# Altium PCB PCB5_V2.PcbDoc
Units mm, origin at the board's own origin, x right, y up, seen from the top; angles counter-clockwise.
Board outline 166 x 110 mm, 2 copper layers (Top Layer, Bottom Layer); 143 components, 60 nets, 336 pads, 115 vias.
Unrouted connection lines stored in the file: 1.
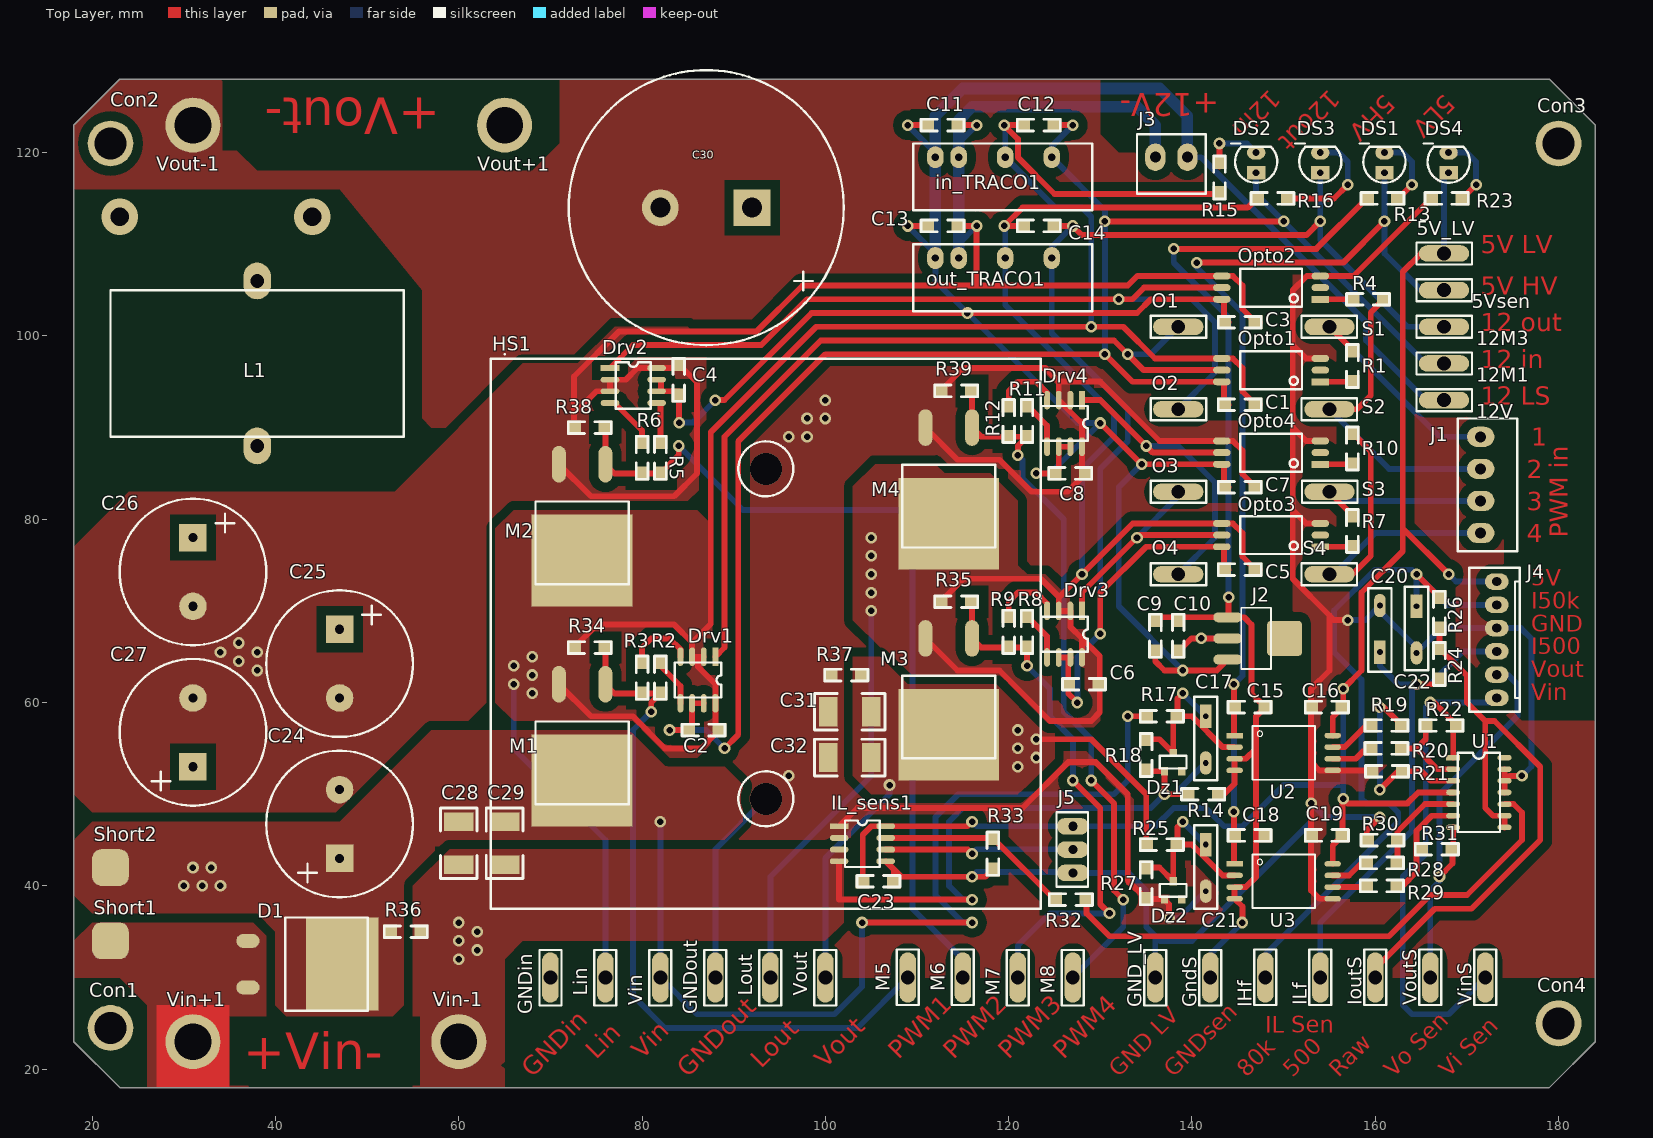
[diagram p0: Top Layer view]
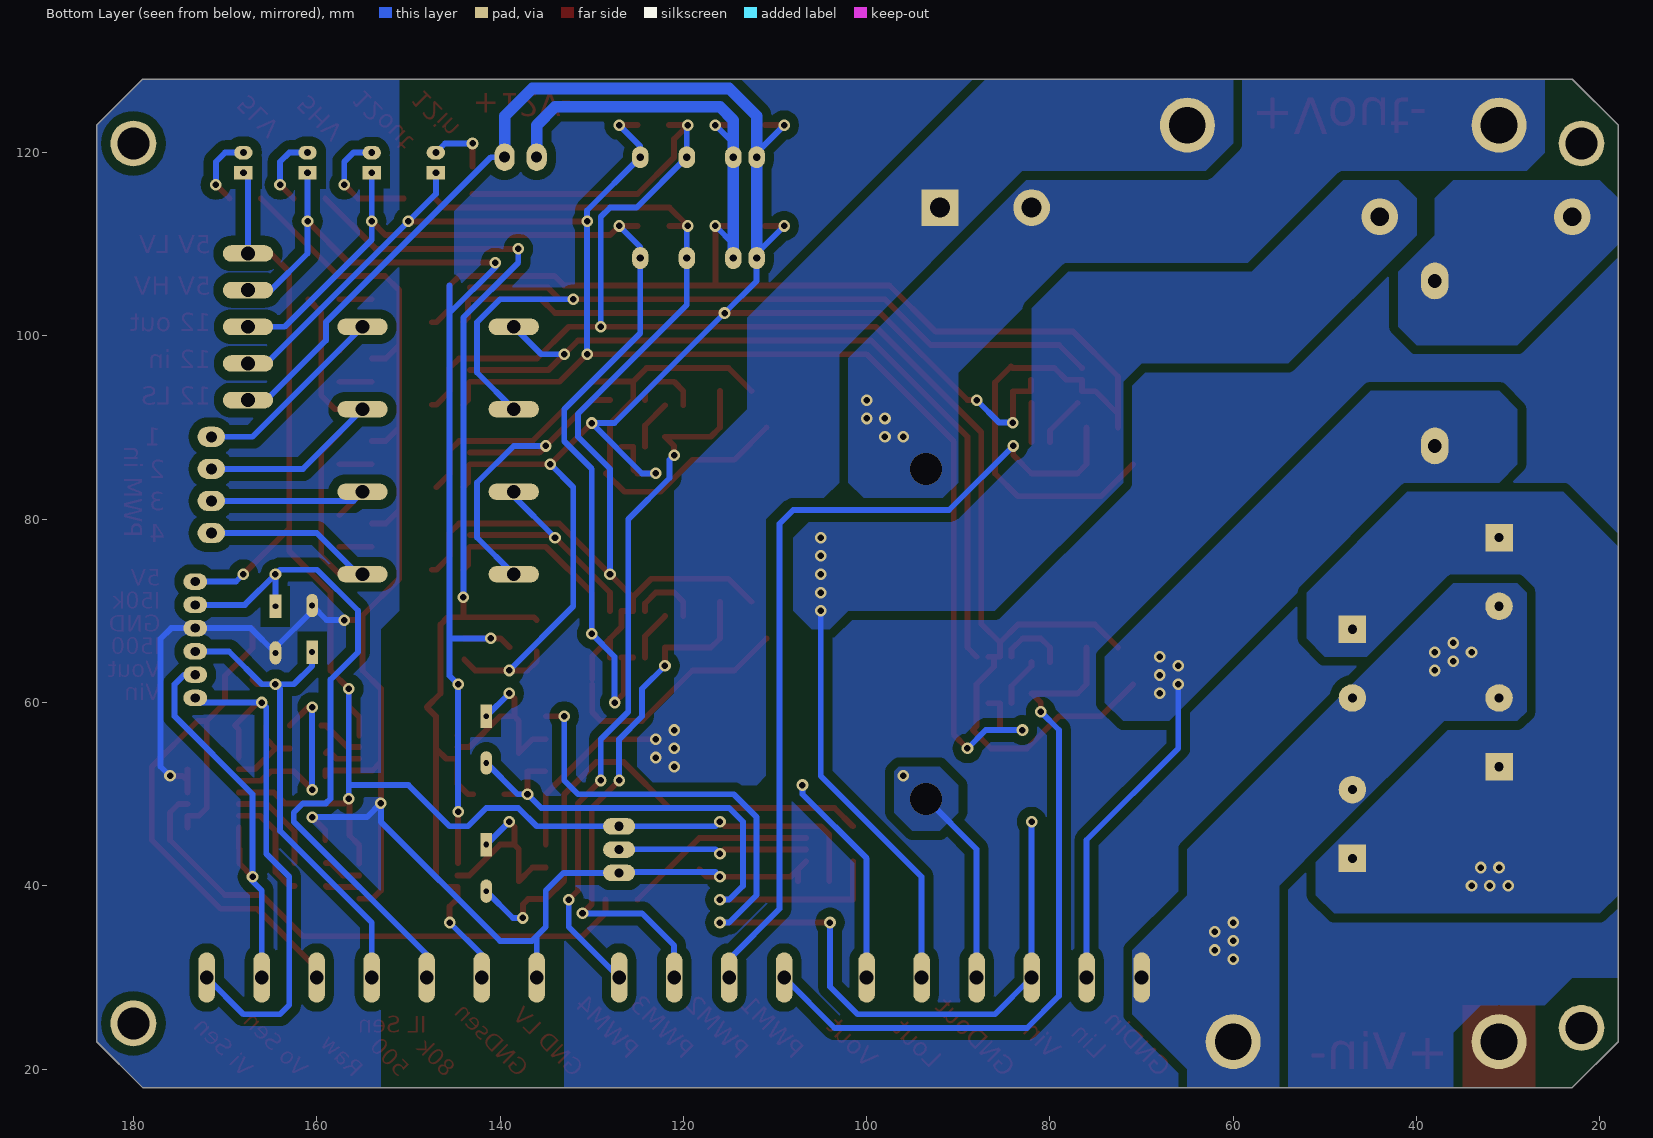
[diagram p1: Bottom Layer view, seen from below]
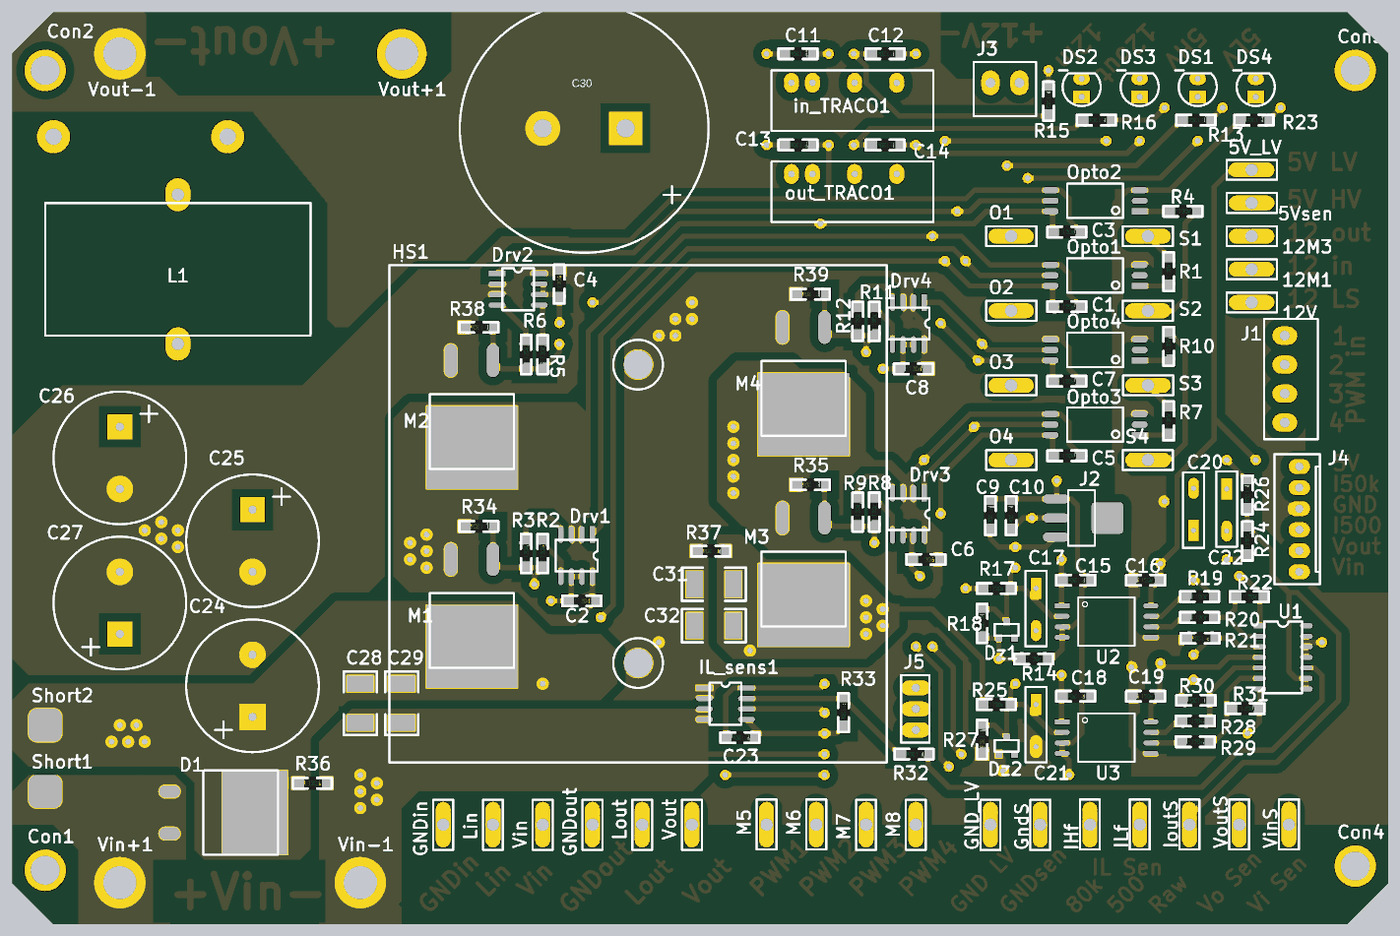
[diagram p2: 3D render of the assembled board from above, using the file's embedded part models]

## Layer stack, top to bottom
Top Solder: solder mask 0.0102, Solder Resist, Dk 3.5
Top Layer: signal copper 0.0356
Dielectric 1: dielectric 0.32, FR-4, Dk 4.8
Bottom Layer: signal copper 0.0356
Bottom Solder: solder mask 0.0102, Solder Resist, Dk 3.5

## Board outline
18,123 23,128 179,128 184,123 184,23 179,18 23,18 18,23

## Design rules (kind name [scope] priority, off if disabled: settings)
Clearance "Polygon Pour" [InPolygon] p1: gap=1
Clearance [All] p2: gap=0.4
Clearance Defoult [InNet('No Net') And OnLayer('Top Layer')] p3: gap=0.4
ComponentClearance [All] p1 off: gap=0.254 collisioncheckmode=3 verticalgap=0.254 showdistances=FALSE
PlaneConnect [All] p1: planeconnectstyle=Direct reliefexpansion=0.508 reliefentries=4 reliefconductorwidth=0.254 reliefairgap=0.254
PolygonConnect [All] p1: connectstyle=Direct reliefconductorwidth=1 reliefentries=4 polygonreliefangle="45 Angle" airgapwidth=0.4
RoutingVias [All] p1: holewidth=0.711 width=2 viastyle="Through Hole" minholewidth=0.711 minwidth=2 maxholewidth=0.711 maxwidth=2
SolderMaskExpansion [All] p1: expansion=0.102
UnConnectedPin [All] p1:
Width [All] p1: maxlimit=10 minlimit=0.635 preferedwidth=10
28 further rules are at their usual default settings.

## Classes and differential pairs
component class Switches_V2: C24 C25 C26 C27 C28 C29 C30 C31 C32 Con1 Con2 Con3 Con4 D1 HS1 L1 M5 M6 M7 M8 R34 R35 R36 R37 R38 R39 Short1 Short2 Vin+1 Vin-1 Vout+1 Vout-1
component class Power_supplies_V2: 5V_LV 5Vsen 12M1 12M3 12V C9 C10 C11 C12 C13 C14 DS1 DS2 DS3 GND_LV GNDin GNDout GndS in_TRACO1 J2 J3 Lin Lout out_TRACO1 R13 R14 R15 R16 Vin Vout
component class Drivers_V2: C1 C2 C3 C4 C5 C6 C7 C8 C? Con1 Con2 Con3 Con4 Drv1 Drv2 Drv3 Drv4 IC? J1 M5 M6 M7 M8 O1 O2 O3 O4 Opto1 Opto2 Opto3 Opto4 R1 R2 R3 R4 R5 R6 R7 R8 R9 R10 R11 R12
component class Signal_processing_V2: B? C15 C16 C17 C18 C19 C20 C21 C22 C23 DS4 Dz1 Dz2 IHf IL_sens1 ILf IoutS J4 J5 R17 R18 R19 R20 R21 R22 R23 R24 R25 R26 R27 R28 R29 R30 R31 R32 R33 U1 U2 U3 U? VinS VoutS

## Components (designator, comment, footprint, x,y, rotation, side; value= is the part's Value field where it differs from the comment)
5V_LV "Test Point" TEST_POINT 167.5,109 r270 top
5Vsen "Test Point" TEST_POINT 167.5,105 r270 top
12M1 "Test Point" TEST_POINT 167.5,97 r270 top
12M3 "Test Point" TEST_POINT 167.5,101 r270 top
12V "Test Point" TEST_POINT 167.5,93 r270 top
C1 "100nF" 1206 143.5,92.5 r0 top
C2 "100nF" 1206 85,57 r0 top
C3 "100nF" 1206 143.5,101.5 r0 top
C4 "100nF" 1206 84,93.5 r90 top
C5 "100nF" 1206 143.5,74.5 r0 top
C6 "100nF" 1206 126.5,62 r0 top
C7 "100nF" 1206 143.5,83.5 r0 top
C8 "100nF" 1206 125,85 r0 top
C9 "100nF" 1206 136,69 r270 top
C10 "100nF" 1206 138.5,69 r270 top
C11 "100nF" 1206 114.5,123 r180 top
C12 "100nF" 1206 125,123 r180 top
C13 "100nF" 1206 114.5,112 r180 top
C14 "100nF" 1206 125,112 r180 top
C15 "100nF" 1206 148,59.5 r180 top
C16 "100nF" 1206 153,59.5 r0 top
C17 "68 nF" "CONDENSADOR_MKP_200MILIS - DUPLICATE" 141.5,58.5 r270 top
C18 "100nF" 1206 148,45.5 r180 top
C19 "100nF" 1206 153,45.5 r0 top
C20 "1uF" "CONDENSADOR_MKP_200MILIS - DUPLICATE" 160.5,65.5 r90 top
C21 "33 nF" "CONDENSADOR_MKP_200MILIS - DUPLICATE" 141.5,44.5 r270 top
C22 "4.7 nF" "CONDENSADOR_MKP_200MILIS - DUPLICATE" 164.5,70.5 r270 top
C23 "100nF" 1206 107.5,40.5 r180 top
C24 "470µF" CE_16DX35MM_PITCH7.5MM 47,43 r90 top
C25 "470µF" CE_16DX35MM_PITCH7.5MM 47,68 r270 top
C26 "470µF" CE_16DX35MM_PITCH7.5MM 31,78 r270 top
C27 "470µF" CE_16DX35MM_PITCH7.5MM 31,53 r90 top
C28 "100nF" 1812 60,47 r270 top
C29 "1uF" 1812 65,47 r270 top
C30 "820µF" CE_30DX35MM_PITCH10MM 92,114 r180 top
C31 "100nF" 1812 105,59 r180 top
C32 "1uF" 1812 105,54 r180 top
Con1 "Support" SUPPORT 22,24.5 r0 top
Con2 "Support" SUPPORT 22,121 r0 top
Con3 "Support" SUPPORT 180,121 r0 top
Con4 "Support" SUPPORT 180,25 r0 top
D1 "????" "D2PAK - DIODE" 37,34 r270 top
Drv1 "NCP81074B" NCP81074A 88,65 r270 top
Drv2 "NCP81074B" NCP81074A 76.5,96.5 r0 top
Drv3 "NCP81074B" NCP81074A 128,70 r270 top
Drv4 "NCP81074B" NCP81074A 128,93 r270 top
DS1 "Green" "LED 2.2MM" 161,120 r0 top
DS2 "Green" "LED 2.2MM" 147,120 r0 top
DS3 "Green" "LED 2.2MM" 154,120 r0 top
DS4 "Green" "LED 2.2MM" 168,120 r0 top
Dz1 "4.7V" "SOT23 - ZENNER" 137,52.5 r0 top
Dz2 "4.7V" "SOT23 - ZENNER" 137,38.5 r0 top
GND_LV "Test Point" TEST_POINT 136,30 r180 top
GNDin "Test Point" TEST_POINT 70,30 r180 top
GNDout "Test Point" TEST_POINT 88,30 r180 top
GndS "Test Point" TEST_POINT 142,30 r180 top
HS1 "Heatsink" Heatsink60x60 63.5,37.5 r90 top
IHf "Test Point" TEST_POINT 148,30 r0 top
IL_sens1 "ACS723LLCTR-20AB-T" SOIC8_GND 101.5,46.5 r0 top
ILf "Test Point" Test_Point 154,30 r0 top
in_TRACO1 "TRACO" TRACO_TMA1212S 112,119.5 r0 top
IoutS "Test Point" Test_Point 160,30 r0 top
J1 "CON4" "CON4_EXTRON _3.5MMPITCH" 171.5,78.5 r90 top
J2 "LD1117" SOT-223_LM1117 147,67 r270 top
J3 "Cleva 2 vias" "CON2_EXTRON _3.5MMPITCH" 136,119.5 r0 top
J4 "CON6" CON6_KK_256 173.25,60.5 r90 top
J5 "Cleva 2 vias" CON_3_100MILIS 127,46.5 r0 top
L1 "mH" TORUS_COIL_1MH 38,88 r90 top
Lin "Test Point" TEST_POINT 76,30 r180 top
Lout "Test Point" TEST_POINT 94,30 r180 top
M1 "MOSFET N" "D2PAK - MOSFET" 76,62 r180 top
M2 "MOSFET N" "D2PAK - MOSFET" 76,86 r180 top
M3 "MOSFET N" "D2PAK - MOSFET" 116,67 r180 top
M4 "MOSFET N" "D2PAK - MOSFET" 116,90 r180 top
M5 "Test Point" TEST_POINT 109,30 r0 top
M6 "Test Point" TEST_POINT 115,30 r0 top
M7 "Test Point" TEST_POINT 121,30 r180 top
M8 "Test Point" TEST_POINT 127,30 r180 top
O1 "Test Point" TEST_POINT 138.5,101 r270 top
O2 "Test Point" TEST_POINT 138.5,92 r270 top
O3 "Test Point" TEST_POINT 138.5,83 r270 top
O4 "Test Point" TEST_POINT 138.5,74 r270 top
Opto1 "ACPL-P302" SSOIC6 154,95 r180 top
Opto2 "ACPL-P302" SSOIC6 154,104 r180 top
Opto3 "ACPL-P302" SSOIC6 154,77 r180 top
Opto4 "ACPL-P302" SSOIC6 154,86 r180 top
out_TRACO1 "TRACO" TRACO_TMA1212S 112,108.5 r0 top
R1 "560OHM" 1206 157.5,95 r90 top
R2 "20" 1206 82,61 r90 top
R3 "20" 1206 80,61 r90 top
R4 "560OHM" 1206 157.5,104 r0 top
R5 "20" 1206 82,85 r90 top
R6 "20" 1206 80,85 r90 top
R7 "560OHM" 1206 157.5,77 r90 top
R8 "20" 1206 122,66 r90 top
R9 "20" 1206 120,66 r90 top
R10 "560OHM" 1206 157.5,86 r90 top
R11 "20" 1206 122,89 r90 top
R12 "20" 1206 120,89 r90 top
R13 "150" 1206 162.5,115 r180 top
R14 "Res. Bridge" 1206 139.5,50 r0 top
R15 "470" 1206 143,119 r270 top
R16 "470" 1206 150.5,115 r180 top
R17 "47k" 1206 135,58.5 r0 top
R18 "2k" 1206 135,56 r270 top
R19 "11k" 1206 159.5,57.5 r0 top
R20 "11k" 1206 159.5,55 r0 top
R21 "27k" 1206 163,52.5 r180 top
R22 "27k" 1206 165.5,57.5 r0 top
R23 "150" 1206 169.5,115 r180 top
R24 "3.3k" 1206 167,62.5 r90 top
R25 "120k" 1206 135,44.5 r0 top
R26 "430" 1206 167,71.5 r270 top
R27 "2k" 1206 135,42 r270 top
R28 "11k" 1206 159,42.5 r0 top
R29 "11k" 1206 159,40 r0 top
R30 "27k" 1206 162.5,45 r180 top
R31 "27k" 1206 165,44 r0 top
R32 "10k" 1206 128.5,38.5 r180 top
R33 "10k" 1206 118.27,45.23 r270 top
R34 "1M" 1206 76,66 r180 top
R35 "1M" 1206 116,71 r180 top
R36 "33K" 1206 52.5,35 r0 top
R37 "47K" 1206 104,63 r180 top
R38 "1M" 1206 76,90 r180 top
R39 "1M" 1206 116,94 r180 top
S1 "Test Point" TEST_POINT 155,101 r90 top
S2 "Test Point" TEST_POINT 155,92 r90 top
S3 "Test Point" TEST_POINT 155,83 r270 top
S4 "Test Point" TEST_POINT 155,74 r90 top
Short1 "CON1" SHORTPAD 22,34 r90 top
Short2 "CON1" SHORTPAD 22,42 r90 top
U1 "LMC6484IM" SOIC_14 168.5,54 r0 top
U2 "ACPL-C870-000E" SSOP8 150,54.5 r0 top
U3 "ACPL-C870-000E" SSOP8 150,40.5 r0 top
Vin "Test Point" TEST_POINT 82,30 r180 top
Vin+1 "CON1" POWERHOLE 31,23 r0 top
Vin-1 "CON1" POWERHOLE 60,23 r0 top
VinS "Test Point" Test_Point 172,30 r0 top
Vout "Test Point" TEST_POINT 100,30 r180 top
Vout+1 "CON1" POWERHOLE 65,123 r0 top
Vout-1 "CON1" POWERHOLE 31,123 r0 top
VoutS "Test Point" Test_Point 166,30 r0 top

## Footprints (in the part's own frame and the unit in brackets; to place one, negate y for a bottom-side part, rotate by r counter-clockwise, add the part's x,y. Pads: shape width x height; smd on the part's side, far side on the other; paste and mask are expansions set on the pad)
1206 [mil] "SMD R&C"
  rect 60x60 smd: 1(0,0) 2(135,0)
  silkscreen extent -25,-25 160,25, body extent 2,-31 128,31
1812 [mm]
  rect 2x3.2 smd: 1(0,0) 2(4.7,0)
  silkscreen extent -1.5,-2 6.2,2
CE_16DX35MM_PITCH7.5MM [mm]
  rect 3x3 hole 1: 1(0,0)
  round 3 hole 1: 2(7.5,0)
  silkscreen extent -4.25,-8 11.75,8
CE_30DX35MM_PITCH10MM [mm]
  rect 4x4 hole 2.2: 1(0,0)
  round 4 hole 2.2: 2(10,0)
  silkscreen extent -10,-15 20,15
"CON2_EXTRON _3.5MMPITCH" [mm]
  oval 2.2x3 hole 1.2: 1(0,0) 2(3.5,0)
  silkscreen extent -2,-4 5.5,2.5
"CON4_EXTRON _3.5MMPITCH" [mm]
  oval 2.2x3 hole 1.2: 1(0,0) 2(3.5,0) 3(7,0) 4(10.5,0)
  silkscreen extent -2,-4 12.5,2.5
CON6_KK_256 [mm]
  oval 1.8x2.6 hole 1: 1(0,0) 2(2.54,0) 3(5.08,0) 4(7.62,0) 5(10.16,0) 6(12.7,0)
  silkscreen extent -1.5,-2.5 14.2,3
CON_3_100MILIS [mm]
  oval 3.5x1.8 hole 1: 1(0,0) 2(0,-2.54) 3(0,-5.08)
  silkscreen extent -1.78,-6.6 1.65,1.52
"CONDENSADOR_MKP_200MILIS - DUPLICATE" [mm] "10nF 1600v"
  rect 2.54x1.27 hole 0.635: 1(0,0)
  oval 2.54x1.27 hole 0.635: 2(5.08,0)
  silkscreen extent -2.12,-1.27 6.99,1.27
"D2PAK - DIODE" [mil] "TO220-superficie"
  oval 60x100 smd: A(0,0) A(200,0)
  rect 400x310 smd: K(100,405)
  silkscreen extent -100,160 300,515
"D2PAK - MOSFET" [mm] "TO220-superficie"
  rect 11x10 smd: D(2.54,10.5)
  oval 1.524x4 smd: G(0,0) S(5.08,0)
  silkscreen extent -2.54,4.06 7.62,13.08
Heatsink60x60 [mm] "Holes 36mm appart"
  round 0 hole 3.5: 1(12,-30) 1(48,-30)
  silkscreen extent 0,-60 60,0
"LED 2.2MM" [mm] "no está modificado"
  rect 2x1.5 hole 0.75: A(0,-2.2)
  oval 2x1.5 hole 0.75: K(0,0)
  silkscreen extent -2.72,-3.3 2.3,1
NCP81074A [mil] "Driver"
  rect 80x25 smd: 1(0,0)
  oval 80x25 smd: 2(0,-50) 3(0,-100) 4(0,-150) 5(200,-150) 6(200,-100) 7(200,-50) 8(200,0)
  silkscreen extent 25,-175 175,25
POWERHOLE [mm]
  round 6 hole 4: 1(0,0)
SHORTPAD [mm]
  rrect50% 4x4 smd: 1(0,0)
SOIC8_GND [mil] "Con plano de masa inferior"
  rect 80x25 smd: 1(0,0)
  oval 80x25 smd: 2(0,-50) 3(0,-100) 4(0,-150) 5(200,-150) 6(200,-100) 7(200,-50) 8(200,0)
  silkscreen extent 25,-175 175,25
SOIC_14 [mil]
  rect 60x24 smd: 1(0,0)
  oval 60x24 smd: 2(0,-50) 3(0,-100) 4(0,-150) 5(0,-200) 6(0,-250) 7(0,-300) 8(220.47,-300) 9(220.47,-250) 10(220.47,-200) 11(220.47,-150) 12(220.47,-100) 13(220.47,-50) 14(220.47,0)
  silkscreen extent 20,-320 201,20
"SOT23 - ZENNER" [mm] "Transistor SMD"
  rect 0.8x0.9 smd: A(0,0) K(0.95,2) NC(1.9,0)
  silkscreen extent -0.5,0.3 2.4,1.7
SOT-223_LM1117 [mm] "SOT-223/SC-73; 4 Leads; Body 6.7 x 7.3 mm, inc. leads (LxW max)"
  oval 1.1x3.15 smd: 1(-2.3,-3.1) 2(0,-3.1) 3(2.3,-3.1)
  rrect20% 3.8x3.8 smd: ""(0,3.1)
  silkscreen extent -3.35,-1.63 3.35,1.63
SSOIC6 [mm] "Circuito de 6 patas SMD"
  rect 1.91x0.762 smd: 1(0,0)
  oval 1.91x0.762 smd: 2(0,-1.27) 3(0,-2.54) 4(10.74,-2.54) 5(10.74,-1.27) 6(10.74,0)
  silkscreen extent 2,-3.34 8.74,0.8
SSOP8 [mm]
  rect 1.8x0.6 smd: 1(-5.35,1.905)
  oval 1.8x0.6 smd: 2(-5.35,0.635) 3(-5.35,-0.635) 4(-5.35,-1.905) 5(5.35,-1.905) 6(5.35,-0.635) 7(5.35,0.635) 8(5.35,1.905)
  silkscreen extent -3.4,-2.93 3.4,2.93
SUPPORT [mm]
  round 5 hole 3.5: ""(0,0)
TEST_POINT [mm]
  oval 1.8x5.5 hole 1.5: 1(0,0)
  silkscreen extent -1.2,-3 1.2,3.05
Test_Point [mm]
  oval 1.8x5.5 hole 1.5: 1(0,0)
  silkscreen extent -1.2,-3 1.2,3.05
TORUS_COIL_1MH [mm]
  oval 4x3 hole 1.5: 1(0,0) 2(18,0)
  silkscreen extent 1,-16 17,16
TRACO_TMA1212S [mm]
  oval 1.8x2.4 hole 0.8: 1(0,0) 2(2.54,0) 4(7.62,0) 6(12.7,0)
  silkscreen extent -2.4,-5.8 17.1,1.5

## Part data
C1 C2 C3 C4 C5 C6 C7 C8 C9 C10 C11 C12 C13 C14 C15 C16 C17 C18 C19 C20 C21 C22 C23 C28 C29 C31 C32: library part Condensador, "Condensador"
C24 C25 C26 C27 C30: library part Cond_Electrolítico, "Condensador Aluminio con polaridad"
D1: library part Diodo, "Diodo"
DS1 DS2 DS3 DS4: library part Led
Dz1 Dz2: library part Zener
IL_sens1: "Current Sensor AC/DC 5V 8-Pin SOIC N Allegro Microsystems ACS723LLCTR-20AB-T, Current Sensor, 8-Pin, SOIC"
in_TRACO1 out_TRACO1: "TracoPower TMA1212S"
J2: "Linear voltage regulator"
J3: library part Con_2
J4: "CONECTOR 6 PINES"
J5: library part Con_3
L1: library part Bobina
M1 M2 M3 M4: "MOSFET de canal N"
Opto1 Opto2 Opto3 Opto4: library part Opto_ACPL
R1 R2 R3 R4 R5 R6 R7 R8 R9 R10 R11 R12 R13 R15 R16 R17 R18 R19 R20 R21 R22 R23 R24 R25 R26 R27 R28 R29 R30 R31 R32 R33 R34 R35 R36 R37 R38 R39: library part Resistencia, "Resistencia"
R14: "Resistencia Bridge"
U1: library part LMC6484IM_1, "14 pin CMOS Quad Rail to Rail Input and Output Operational Amplifier 55 per tube"
U2 U3: "Isolation Amplifier [Broadcom] ACPL-C870-000E Isolation Amplifier"

## Via types
v1: diameter 1.27, hole 0.711, Top Layer to Bottom Layer, 111 vias
v2: diameter 3.5, hole 3.5, Top Layer to Bottom Layer, 2 vias
v3: diameter 4, hole 2, Top Layer to Bottom Layer, 2 vias

## Nets (pads, with @x,y where several pads share a name; then routed paths per layer and width w, separated by ;. In a path a pad name is that pad's centre, name@x,y a point inside that pad or via, vN(x,y) a via of type N, cw(c..) or ccw(c..) an arc to the next point about the centre after c; other vN are vias at no path point)
5V_HV: 5Vsen.1 C10.2 C15.2 C18.2 DS1.A J2.2 U2.1 U3.1 | length 125.8
  Top Layer w0.635: C10.2@138.964,66.035 139.929,67 J2.2 ; v1(140.5,108) 156.5,108 v1(161,112.5) ; U3.1@144.571,42.484 C18.2 v1(144.571,48.071) ; v1(144.571,62) C15.2 144.571,56.484 U2.1
  Bottom Layer w0.635: v1(140.5,108) 140.5,107.5 145.5,102.5 ; v1(141,67) 145.5,67 ; v1(144.571,48.071) v1(144.571,62) 145.5,62.929 145.5,67 ; 145.5,105.5 145.5,102.5 ; DS1.A 161,109 165,105 5Vsen.1 ; 145.5,67 145.5,102.5
5V_LV: 5V_LV.1 C16.2 C19.2 C23.2 DS4.A IL_sens1.8 J4.6 J5.1 U1.4 U2.8 U3.8 | length 175
  Top Layer w0.635: C23.2 104.071,45.571 105,46.5 IL_sens1.8 115.5,46.5 v1(116,47) ; U3.8 155.35,44.421 C19.2 156.429,49.571 v1(156.5,49.5) 157,49 163.5,49 164.69,50.19 U1.4 ; U2.8 155.35,58.421 C16.2 156.5,59.571 v1(156.5,61.5) 158.5,63.5 158.5,72 163,76.5 163,79 ; 5V_LV.1 165,109 163,107 163,79 ; v1(168,74) 163,79
  Bottom Layer w0.635: v1(116,47) 116.5,46.5 J5.1 136,46.5 138,48.5 141.5,48.5 143.5,46.5 145.5,46.5 150,51 156.5,51 ; v1(156.5,49.5) 156.5,51 ; v1(156.5,61.5) 156.5,51 ; 5V_LV.1 167.5,117.3 DS4.A ; v1(168,74) 168.8,73.2 J4.6
12V_HV_HS_IN: 12M1.1 C1.1 C2.1 C12.1 Drv1.6 Drv1.7 DS2.A in_TRACO1.6 Opto1.6 | length 187.7
  Top Layer w0.635: v1(83,57) C2.1 ; C2.1@85.46,57.46 Drv1.6 Drv1.7 ; v1(89,55) 90.5,56.5 90.5,88.5 100,98 v1(130.5,98) 133.5,95 Opto1.6 143.5,94.76 143.5,93 C1.1@144,92.5 ; C12.1 v1(127,123) ; v1(130.5,112.5) v1(150,112.5)
  Bottom Layer w0.635: v1(83,57) 87,57 v1(89,55) ; v1(127,123) 124.7,120.7 in_TRACO1.6 130.5,113.7 v1(130.5,98) ; DS2.A 147,115.5 165.5,97 12M1.1
12V_HV_HS_OUT: 12M3.1 C5.1 C6.1 C14.1 Drv3.6 Drv3.7 DS3.A Opto3.6 out_TRACO1.6 | length 142.8
  Top Layer w0.635: C14.1 v1(127,112) 128,111 152.5,111 v1(154,112.5) ; Drv3.6 Drv3.7 126.5,64.69 C6.1 126.5,61 v1(127.5,60) ; v1(130,67.5) 130,72 135,77 Opto3.6 143.5,76.76 143.5,75 C5.1@144,74.5
  Bottom Layer w0.635: v1(127,112) 124.7,109.7 out_TRACO1.6 124.7,100.3 133,92 133,88.5 130,85.5 v1(130,67.5) 127.5,65 v1(127.5,60) ; DS3.A v1(154,112.5) 154,110.5 163.5,101 12M3.1
12V_HV_LS: 12V.1 C3.1 C4.1 C7.1 C8.1 C9.2 C11.2 C13.2 Drv2.6 Drv2.7 Drv4.6 Drv4.7 in_TRACO1.1 J2.3 J3.2 Opto2.6 Opto4.6 out_TRACO1.1 | length 273.8
  Top Layer w0.635: Drv2.7@82.08,95.23 82.08,93.96 84.04,93.96 v1(84.04,90.54) ; v1(88,93) 89,93 98.5,102.5 v1(115.5,102.5) 134,102.5 135.5,104 Opto2.6 143.5,103.76 143.5,102 C3.1@144,101.5 ; v1(109,112) C13.2 ; v1(109,123) C11.2 ; v1(123,85) C8.1 125.46,85.46 Drv4.6 Drv4.7 ; v1(130,90.5) v1(134.5,86) Opto4.6 143.5,85.76 143.5,84 C7.1@144,83.5 ; C9.2 136,64.5 137,63.5 v1(139,63.5) 142.7,63.5 J2.3
  Bottom Layer w0.635: v1(84.04,90.54) 85.54,90.54 v1(88,93) ; v1(109,112) out_TRACO1.1@112,109 ; v1(109,123) in_TRACO1.1@112,120 ; out_TRACO1.1 112,106 v1(115.5,102.5) 127.5,90.5 v1(130,90.5) 124.5,85 v1(123,85) ; v1(134.5,86) 132,83.5 132,70.5 v1(139,63.5) ; J3.2@139.5,119 J3.2 141,119.5 159,101.5 159,99.5 165.5,93 12V.1
  Bottom Layer w1.27: out_TRACO1.1@112,109 in_TRACO1.1 112,120 112,124 115,127 136.5,127 139.5,124 J3.2
GND_HV_HS_IN: C1.2 C2.2 C12.2 Drv1.2 Drv1.3 Drv1.8 in_TRACO1.4 L1.1 Lin.1 M1.S M2.D Opto1.4 R15.2 R34.2 | length 234.9
  Top Layer w0.635: M1.S 74.42,58.5 79,58.5 82.5,55 86.429,55 C2.2 88,57.429 Drv1.8 88,62 86.095,63.905 86.095,65 ; R34.2 75.071,68.5 83.5,68.5 85.46,66.54 ; Drv1.2 Drv1.3 85.46,66.54 ; C12.2 v1(119.5,123) 121,121.5 121,119.5 125,115.5 R15.2@143,115.5 ; C1.2@147.429,92.5 C1.2 145.5,93.929 145.5,96.5 144.46,97.54 Opto1.4 135.96,97.54 132.5,101 v1(129,101) 99,101 87.5,89.5 87.5,68.58 85.46,66.54
  Bottom Layer w0.635: v1(66,62) 66,55 76,45 Lin.1 ; v1(119.5,123) 119.62,122.88 in_TRACO1.4 125.12,114 128,114 129,113 v1(129,101)
  other v1: 68,61 68,63 66,64 68,65
GND_HV_HS_OUT: C5.2 C6.2 C14.2 Drv3.2 Drv3.3 Drv3.8 L1.2 Lout.1 M3.S M4.D Opto3.4 out_TRACO1.4 R16.2 R35.2 | length 203.2
  Top Layer w0.635: M3.S 114.42,63.5 119,63.5 124.5,58 129,58 129.929,58.929 C6.2 ; R35.2 115.071,73.5 123.5,73.5 125.46,71.54 Drv3.3 Drv3.2 126.73,68.27 128,67 ; C14.2@121.5,112 v1(119.5,112) 121.5,114 146.071,114 R16.2 ; 125.54,71.54 133.54,79.54 Opto3.4 144.46,79.54 145.5,78.5 145.5,75.929 C5.2 C5.2@147.429,74.5 ; Drv3.8 128,67 ; C6.2@129.929,62.5 129.929,65.071 128,67
  Bottom Layer w0.635: Lout.1 94,41 105,52 v1(105,70) ; v1(119.5,112) 119.62,111.88 out_TRACO1.4 119.62,103.38 131.5,91.5 131.5,89 128,85.5 v1(128,74)
  other v1: 105,72 105,74 105,76 105,78
  other v3: 23,113 44,113
GND_HV_LS_IN: C3.2 C4.2 C11.1 C13.1 C17.2 C24.2 C25.2 C26.2 C27.2 C28.2 C29.2 Drv2.2 Drv2.3 Drv2.8 Dz1.A GNDin.1 IL_sens1.3 IL_sens1.4 in_TRACO1.2 J3.1 M2.S Opto2.4 out_TRACO1.2 R14.1 R18.2 R36.2 R38.2 Vin-1.1 | length 257
  Top Layer w0.635: M2.S 74.42,82.5 83.5,82.5 86,85 86,94.929 84.25,96.679 84.071,96.5 79.5,96.5 78.23,95.23 Drv2.2 Drv2.3 75.04,93.96 72.571,91.491 ; R38.2 72.571,91.491 ; IL_sens1.4 101.5,38.5 v1(116,38.5) ; C13.1 v1(116.5,112) 116.5,105.5 ; C11.1 v1(116.5,123) ; R18.2@135.071,52.5 Dz1.A v1(137,50) R14.1 ; C3.2@147.429,101.5 C3.2 145.5,102.929 145.5,105.5 144.46,106.54 Opto2.4 134.04,106.54 133,105.5 116.5,105.5 ; 72.571,91.491 72.571,95.571 77.5,100.5 92.5,100.5 97.5,105.5 116.5,105.5
  Bottom Layer w0.635: 114.54,110.04 v1(116.5,112) ; 114.54,121.04 v1(116.5,123) ; v1(116,38.5) 115,38.5 113.5,40 113.5,47 115,48.5 135.5,48.5 v1(137,50) 138.08,50 C17.2
  Bottom Layer w1.27: out_TRACO1.2 114.54,110.04 in_TRACO1.2 114.54,121.04 114.54,123.54 116,125 134,125 136,123 J3.1
  other v1: 60,32 62,33 60,34 62,35 60,36 38,63.5 36,64.5 34,65.5 38,65.5 36,66.5
GND_HV_LS_OUT: C7.2 C8.2 C21.2 C30.2 C31.2 C32.2 Drv4.2 Drv4.3 Drv4.8 Dz2.A GNDout.1 HS1.1 IL_sens1.1 IL_sens1.2 M4.S Opto4.4 R27.2 R37.2 R39.2 Vout-1.1 | length 154.1
  Top Layer w0.635: IL_sens1.1 103.5,48.5 121.5,48.5 126.5,53.5 129.5,53.5 133,50 133,40.571 R27.2 136.929,38.571 137.5,38 v1(137.5,36.5) ; M4.S 114.42,86.5 119,86.5 122.5,83 126.429,83 C8.2 128,85.429 Drv4.8 128,90.46 Drv4.3 125.46,95.04 ; R39.2 115.071,96.5 124,96.5 125.46,95.04 ; C7.2 145.5,84.929 145.5,87.5 144.46,88.54 Opto4.4 136.46,88.54 129.96,95.04 125.46,95.04
  Bottom Layer w0.635: GNDout.1 88,44 v2(93.5,49.5) ; v1(137.5,36.5) 138.58,36.5 C21.2
  other v1: 96,52 96,89 98,89 98,91 100,91 100,93
  other v2: 93.5,85.5
GND_HV_SENSORS: C9.1 C10.1 C15.1 C18.1 GndS.1 J2.1 R13.2 R14.2 U2.3 U2.4 U3.3 U3.4 | length 127.8
  Top Layer w0.635: C9.1 136.3,69.3 J2.1 ; v1(138,109.5) 153.571,109.5 R13.2 ; R14.2 143.5,50 144.65,51.15 U2.4 U2.3 145.865,53.865 147,55 ; v1(144,71.5) 144,69.4 J2.1 ; v1(145.5,36) 145.5,37.745 U3.4 U3.3 145.865,39.865 147,41 147,55 ; J2.1 145.7,69.3 146.5,68.5 146.5,61 C15.1 147,58.5 147,55
  Bottom Layer w0.635: v1(138,109.5) 138,108 144,102 v1(144,71.5) ; GndS.1 142,32.5 v1(145.5,36)
GND_LV: C16.1 C19.1 C20.2 C22.2 C23.1 GND_LV.1 IL_sens1.5 J4.4 J5.3 Opto1.3 Opto2.3 Opto3.3 Opto4.3 R21.2 R23.2 R30.2 R33.2 U1.11 U1.12 U1.13 U2.5 U3.5 | length 237.5
  Top Layer w0.635: C23.1 107.5,41.77 IL_sens1.5 108.27,41 v1(116,41) 117.469,41 R33.2 ; Opto3.3 152.46,79.54 151,81 ; Opto4.3 152.46,88.54 151,90 ; Opto1.3 152.46,97.54 151,99 ; Opto2.3 152.54,106.54 ; U3.5 153.905,38.595 153,39.5 C19.1 v1(153,49) 153,53.5 ; v1(157,69) 155.5,69 155,69.5 ; R30.2 159.071,46.071 v1(160.5,47.5) ; R21.2@159.071,52 159.071,52.595 U2.5 153.905,52.595 153,53.5 ; R23.2 157.611,106.54 152.54,106.54 ; U1.11 U1.12 ; U1.13 U1.12 ; v1(176,52) 174.64,52 U1.12 ; 151,81 151,73.5 155,69.5 ; 151,81 151,90 ; 151,90 151,99 ; 151,99 151,105 152.54,106.54 ; 153,53.5 C16.1 153,61.5 155,63.5 155,69.5
  Bottom Layer w0.635: v1(116,41) 116.5,41.5 J5.3@126.92,41.5 ; J5.3 133.08,41.42 135,39.5 135,35.5 136.5,34 140,34 153,47 v1(153,49) 154.5,47.5 v1(160.5,47.5) ; GND_LV.1 136,34.5 ; v1(157,69) 158.92,69 C20.2 160.5,70 164.5,66 C22.2 167.2,68.12 J4.4 175.88,68.12 177.035,66.965 177.035,53.035 v1(176,52)
NetC20_1: C20.1 ILf.1 J4.3 R24.1 | length 55.6
  Top Layer w0.635: v1(164.5,62) 166.5,62 R24.1
  Bottom Layer w0.635: ILf.1 154,36 164,46 164,61.5 v1(164.5,62) ; C20.1 160.5,64 162.5,62 v1(164.5,62) ; J4.3 169.58,65.58 166,62 v1(164.5,62)
NetC22_1: C22.1 IHf.1 J4.5 R26.1 | length 78.6
  Top Layer w0.635: v1(164.5,74) R26.1
  Bottom Layer w0.635: IHf.1 148,32.5 162.5,47 162.5,48 161.5,49 159,49 158.5,49.5 158.5,62.5 155.5,65.5 155.5,70.044 159.956,74.5 164,74.5 v1(164.5,74) ; C22.1 v1(164.5,74) ; J4.5 167.84,70.66 v1(164.5,74)
NetD1_A: D1.A Short1.1 Vin+1.1
NetDrv1_1: Drv1.1 O1.1 Opto1.5 | length 91.1
  Top Layer w0.635: Drv1.1 89,66 89,89 99.5,99.5 131.5,99.5 134.73,96.27 Opto1.5
  Bottom Layer w0.635: v1(133,98) 135.5,98 O1.1
NetDrv1_4: Drv1.4 R3.2 | length 7.5
  Top Layer w0.635: R3.2 80,66 81,67 83,67 84.19,65.81 Drv1.4
NetDrv1_5: Drv1.5 R2.2 | length 5.4
  Top Layer w0.635: R2.2 82,64 84.19,61.81 Drv1.5
NetDrv2_1: Drv2.1 O2.1 Opto2.5 | length 93.1
  Top Layer w0.635: Drv2.1 79,99 93,99 98,104 133.5,104 134.77,105.27 Opto2.5
  Bottom Layer w0.635: v1(132,104) 140,104 142.5,101.5 142.5,96 O2.1
NetDrv2_4: Drv2.4 R6.2 | length 5.5
  Top Layer w0.635: Drv2.4@77,92.69 80,89.69 R6.2
NetDrv2_5: Drv2.5 R5.2 | length 4.3
  Top Layer w0.635: R5.2 Drv2.5@82,92.69
NetDrv3_1: Drv3.1 O3.1 Opto3.5 | length 26.7
  Top Layer w0.635: Drv3.1 128,72 v1(134,78) 134.27,78.27 Opto3.5
  Bottom Layer w0.635: v1(134,78) 138.5,82.5 O3.1
NetDrv3_4: Drv3.4 R9.2 | length 7.5
  Top Layer w0.635: R9.2 120,71 121,72 123,72 124.19,70.81 Drv3.4
NetDrv3_5: Drv3.5 R8.2 | length 5.4
  Top Layer w0.635: R8.2 124.19,67.239 Drv3.5
NetDrv4_1: Drv4.1 O4.1 Opto4.5 | length 38.4
  Top Layer w0.635: Drv4.1 130,93 v1(135,88) 135.73,87.27 Opto4.5
  Bottom Layer w0.635: v1(135,88) 138.5,88 142.5,84 142.5,78 O4.1
NetDrv4_4: Drv4.4 R12.2 | length 7.5
  Top Layer w0.635: R12.2 120,94 121,95 123,95 124.19,93.81 Drv4.4
NetDrv4_5: Drv4.5 R11.2 | length 5.4
  Top Layer w0.635: R11.2 124.19,90.239 Drv4.5
NetDS1_K: DS1.K R13.1 | length 8
  Top Layer w0.635: R13.1 v1(164,116.5)
  Bottom Layer w0.635: DS1.K 163,120 164,119 v1(164,116.5)
NetDS2_K: DS2.K R15.1 | length 6.9
  Top Layer w0.635: R15.1@143,118.5 v1(143,121)
  Bottom Layer w0.635: v1(143,121) 146,121 DS2.K
NetDS3_K: DS3.K R16.1 | length 13
  Top Layer w0.635: R16.1 155.5,115 v1(157,116.5)
  Bottom Layer w0.635: DS3.K 156,120 157,119 v1(157,116.5)
NetDS4_K: DS4.K R23.1 | length 8
  Top Layer w0.635: R23.1 v1(171,116.5)
  Bottom Layer w0.635: DS4.K 170,120 171,119 v1(171,116.5)
NetIL_sens1_6: IL_sens1.6 J5.2 | length 20.8
  Top Layer w0.635: IL_sens1.6 115.54,43.96 v1(116,43.5)
  Bottom Layer w0.635: v1(116,43.5) 116.5,44 J5.2@126.96,44
NetIL_sens1_7: IL_sens1.7 R32.2 R33.1 | length 21.2
  Top Layer w0.635: IL_sens1.7 R33.1 R32.2@125,38.5
NetIoutS_1: IoutS.1 R24.2 R26.2 U1.8 U1.9 | length 65.9
  Top Layer w0.635: IoutS.1@159.5,30.5 166.5,37.5 170.5,37.5 178,45 178,53 173,58 172,58 ; R26.2 R24.2 170,62.929 170,60 172,58 ; U1.8 U1.9 172.85,47.65 172,48.5 172,58
NetJ1_1: J1.1 R10.2 S4.1 | length 37.9
  Top Layer w0.635: S4.1 157.5,74 159.5,76 159.5,87.429 R10.2
  Bottom Layer w0.635: S4.1 155.5,74 160,78.5 J1.1
NetJ1_2: J1.2 R7.2 S3.1 | length 20.5
  Top Layer w0.635: S3.1 155,82.929 R7.2
  Bottom Layer w0.635: S3.1 156,82 J1.2
NetJ1_3: J1.3 R4.2 S2.1 | length 35.4
  Top Layer w0.635: S2.1 158,92 159.5,93.5 159.5,102.571 R4.2
  Bottom Layer w0.635: S2.1 161.5,85.5 J1.3
NetJ1_4: J1.4 R1.2 S1.1 | length 26.3
  Top Layer w0.635: S1.1 157.5,98.5 R1.2
  Bottom Layer w0.635: S1.1@155,100.5 155.5,101 S1.1 167,89 J1.4
NetJ4_1: J4.1 R22.2 U1.1 VinS.1 | length 60.4
  Top Layer w0.635: v1(166,60) 166.429,60 R22.2 168.5,57.071 U1.1
  Bottom Layer w0.635: VinS.1 168,26 164,26 163,27 163,41 165.5,43.5 165.5,59.5 v1(166,60) 172.75,60 J4.1
NetJ4_2: J4.2 R31.2 U1.7 VoutS.1 | length 44.6
  Top Layer w0.635: v1(167,41) 168.429,42.429 R31.2 168.5,44.071 U1.7
  Bottom Layer w0.635: VoutS.1 166,39.5 167,40.5 v1(167,41) 167,50 175.5,58.5 175.5,62 174.46,63.04 J4.2
NetM1_G: M1.G M5.1 R2.1 R3.1 R34.1 | length 78.4
  Top Layer w0.635: R34.1 M1.G 77,61 R3.1 R2.1 81,60 v1(81,59)
  Bottom Layer w0.635: v1(81,59) 79,57 79,28 82.5,24.5 103.5,24.5 M5.1
NetM2_G: M2.G M6.1 R5.1 R6.1 R38.1 | length 95
  Top Layer w0.635: R38.1 M2.G 77,85 R6.1 R5.1 84,87 v1(84,88)
  Bottom Layer w0.635: v1(84,88) 91,81 108,81 109.5,79.5 109.5,37.5 115,32 M6.1
NetM3_G: M3.G M7.1 R8.1 R9.1 R35.1 | length 58.1
  Top Layer w0.635: R35.1 M3.G 117,66 R9.1 R8.1 v1(122,64) ; v1(127,51.5) 130,48.5 130,38 v1(131,37)
  Bottom Layer w0.635: M7.1 121,33.5 124.5,37 v1(131,37) ; v1(122,64) 124.5,61.5 124.5,58.5 127,56 v1(127,51.5)
NetM4_G: M4.G M8.1 R11.1 R12.1 R39.1 | length 76.9
  Top Layer w0.635: R39.1 M4.G 117,89 R12.1 R11.1 121,88 v1(121,87) ; v1(129,51.5) 131.5,49 131.5,39.5 v1(132.5,38.5)
  Bottom Layer w0.635: v1(121,87) 121.5,86.5 121.5,84.5 126,80 126,65.5 126,59 129,56 v1(129,51.5) ; M8.1 132.5,35.5 v1(132.5,38.5)
NetOpto1_1: Opto1.1 R1.1 | length 3.5
  Top Layer w0.635: Opto1.1 R1.1
NetOpto2_1: Opto2.1 R4.1 | length 3.5
  Top Layer w0.635: Opto2.1 R4.1
NetOpto3_1: Opto3.1 R7.1 | length 3.5
  Top Layer w0.635: Opto3.1 R7.1
NetOpto4_1: Opto4.1 R10.1 | length 3.5
  Top Layer w0.635: Opto4.1 R10.1
NetR19_1: R19.1 U2.7 | length 5.1
  Top Layer w0.635: U2.7 156.635,55.135 159,57.5 R19.1
NetR19_2: R19.2 R21.1 U1.3 | length 23.5
  Top Layer w0.635: v1(160.5,50.5) R21.1@162.5,52.5 ; v1(160.5,59.5) 160.929,59.5 R19.2 ; 161.46,51.46 R21.1@162.5,52.5 ; R21.1 R21.1@162.5,52.5 ; U1.3 166.04,51.46 165,52.5 R21.1@162.5,52.5
  Bottom Layer w0.635: v1(160.5,50.5) v1(160.5,59.5)
NetR20_1: R20.1 U2.6 | length 4.1
  Top Layer w0.635: U2.6 157.865,53.865 158.75,54.75 R20.1@159,54.5
NetR20_2: R20.2 R22.1 U1.2 | length 9.4
  Top Layer w0.635: R20.2 164.5,55 ; R22.1 165.5,56 164.5,55 ; U1.2 166.77,52.73 164.5,55
NetR28_1: R28.1 U3.7 | length 4.2
  Top Layer w0.635: U3.7 157.135,41.135 158.5,42.5 R28.1
NetR28_2: R28.2 R30.1 U1.5 | length 10.7
  Top Layer w0.635: R28.2 162.429,45.929 165.42,48.92 U1.5
NetR29_1: R29.1 U3.6 | length 3.7
  Top Layer w0.635: U3.6 158.865,39.865 R29.1
NetR29_2: R29.2 R31.1 U1.6 | length 11.9
  Top Layer w0.635: R29.2 163,40 164.5,41.5 164.5,46 166.15,47.65 U1.6
NetR32_1: R32.1 U1.10 | length 59.7
  Top Layer w0.635: R32.1 128.5,37 131,34.5 161.5,34.5 166,39 170,39 176,45 176,48 175.08,48.92 U1.10
VIN: C24.1 C25.1 C26.1 C27.1 C28.1 C29.1 D1.K M1.D R17.1 R36.1 Short2.1 Vin.1 | length 106.3
  Top Layer w0.635: v1(104,36) v1(116,36) ; v1(133,58.5) R17.1
  Bottom Layer w0.635: v1(82,47) Vin.1 86,26 101,26 104,29 v1(104,36) ; v1(116,36) 115,36 112,39 112,47.5 114.5,50 131.5,50 133,51.5 v1(133,58.5)
  other v1: 30,40 32,40 34,40 31,42 33,42
VIN_SEN: C17.1 Dz1.K R17.2 R18.1 U2.2 | length 21.7
  Top Layer w0.635: R18.1 136.45,56 Dz1.K 137.95,58.021 R17.2 ; v1(139,61) 138.429,60.429 R17.2 ; U2.2 143.365,55.135 140,58.5 R17.2
  Bottom Layer w0.635: v1(139,61) C17.1
VOUT: C30.1 C31.1 C32.1 M3.D R25.1 R37.1 Vout+1.1 Vout.1 | length 43.9
  Top Layer w0.635: v1(123,56) 129,56 135,50 R25.1
  Bottom Layer w0.635: Vout.1 100,43 107,50 v1(107,51)
  other v1: 121,53 123,54 121,55 121,57
VOUT_SEN: C21.1 Dz2.K R25.2 R27.1 U3.2 | length 21.7
  Top Layer w0.635: R27.1 136.45,42 Dz2.K 137.95,44.021 R25.2 ; v1(139,47) 138.429,46.429 R25.2 ; U3.2 143.365,41.135 140,44.5 R25.2
  Bottom Layer w0.635: v1(139,47) C21.1
pads on no net: Con1. Con2. Con3. Con4. Dz1.NC Dz2.NC J2. Opto1.2 Opto2.2 Opto3.2 Opto4.2 U1.14

## Polygon pours and split planes (outlines as drawn)
no net on Bottom Layer "Bottom Layer-No Net" (solid, pour order 109): 18,23 23,18 133,18 133,34 134,35 141,35 147,41 147,68 145,70 145,128 23,128 18,123
GND_LV on Bottom Layer "Bottom Layer-No Net" (solid, pour order 107): 179,18 153,18 153,67 153,68 151,70 151,128 179,128 184,123 184,23
GND_HV_LS_IN on Bottom Layer "Bottom Layer-No Net" (solid, pour order 72): 65,18 55,18 55,40 37,58 29,58 28,59 28,72 29,73 36,73 65,44 65,39 71,33 71,26 65,20
VIN on Bottom Layer "Bottom Layer-No Net" (solid, pour order 74): 50,65 45,65 36,74 29,74 27,72 27,59 29,57 37,57 51,43 51,39 49,37 20,37 18,39 18,77 24,83 41,83 52,72 52,67
GND_HV_HS_IN on Bottom Layer "Bottom Layer-No Net" (solid, pour order 76): 31,84 29,86 29,92 31,94 45,94 74,65 74,60 72,58 67,58 41,84
GND_HV_HS_OUT on Bottom Layer "Bottom Layer-No Net" (solid, pour order 78): 86,70 102,70 104,68 106,68 108,70 108,78 106,80 90,80 84,86 82,88 82,103 78,107 58,107 48,117 42,117 40,115 40,111 54,97 70,97 72,95 72,84
VOUT on Bottom Layer "Bottom Layer-No Net" (solid, pour order 93): 60,128 60,121 63,118 83,118 103,98 103,84 105,82 109,82 111,80 111,52 112,51 123,51 125,53 125,57 121,61 121,84 113,92 113,102 87,128
GND_HV_LS_OUT on Bottom Layer "Bottom Layer-No Net" (solid, pour order 95): 83,117 63,117 59,121 59,128 26,128 26,120 28,118 48,118 58,108 78,108 90,96 90,84 92,82 100,82 102,84 102,98
GND_HV_LS_OUT on Bottom Layer "Bottom Layer-No Net" (solid, pour order 97): 95,46 92,46 90,48 90,51 92,53 96.5,53 97,52.5 97,48
GND_HV_HS_OUT on Bottom Layer "Bottom Layer-No Net" (solid, pour order 99): 38,111 42,107 42,101 40,99 31,99 29,99 18,110 18,115 20,117 36,117 38,115
GND_LV on Top Layer "Bottom Layer-No Net" (solid, pour order 105): 184,123 179,128 151,128 151,70 153,68 153,18 179,18 184,23
GND_HV_LS_OUT on Top Layer "Bottom Layer-No Net" (solid, pour order 103): 18,23 23,18 133,18 133,34 134,35 141,35 147,41 147,68 145,70 145,128 23,128 18,123 18,116 47,116 56,105 56,91 57,90 59,90 53,84 24,84 18,78
GND_HV_LS_IN on Top Layer "Bottom Layer-No Net" (solid, pour order 80): 65,18 55,18 55,40 59,44 102,44 102,36 100,34 67,34 65,32
GND_HV_HS_IN on Top Layer "Bottom Layer-No Net" (solid, pour order 81): 86,54 83,54 79,58 66,58 64,60 64,79 66,81 86,81 88,79 88,56
GND_HV_LS_OUT on Top Layer "Bottom Layer-No Net" (solid, pour order 83): 92,47 94,45 102,45 102,84 105,87 112,87 114,89 114,95 115,96 116,96 116,97 101,97 92,88
VOUT on Top Layer "Bottom Layer-No Net" (solid, pour order 85): 103,52 105,50 121,50 125,53.5 125,57 123,59 122,59 119,62 109,62 106,65 103,65
GND_HV_HS_OUT on Top Layer "Bottom Layer-No Net" (solid, pour order 87): 119,63 109,63 103,69 103,84 105,86 112,86 113,85 118,85 121,82 121,75 122,74 124,74 126,72 127,72 129,70 129,66 130,65 130,58 129,57 125,57
VIN on Top Layer "Bottom Layer-No Net" (solid, pour order 89): 91,47 89,45 59,45 54,40 54,33 54,27 52,25 42,25 40,27 40,35 38,37 20,37 18,39 18,45 20,47 47,47 57,57 79,57 82,54 83,53 88,53 89,53 91,51
NetD1_A on Top Layer "Bottom Layer-No Net" (solid, pour order 91): 39,35 38,36 20,36 18,34 18,23 23,18 37,18 39,20
GND_HV_LS_IN on Top Layer "Bottom Layer-No Net" (solid, pour order 101): 87,84 85,82 66,82 63,79 63,60 61,58 57,58 47,48 20,48 18,50 18,77 24,83 53,83 67,97 70,97 73,97 77,101 85,101 87,99

## Other copper
Top Layer:
  rectangle net NetD1_A: 27,18 35,27
  pour cut-out: 34,128 35,127 35,121 38,118 68,118 71,121 71,128
  pour cut-out: 26,18 26,27 23,30 18,30 18,23 23,18
  pour cut-out: 186.5,61 178.5,61 176.5,63 176.5,92 172.5,96 172.5,120 169.5,123 134.5,123 132.5,125 132.5,131 181.5,131 186.436,126.064
  pour cut-out: 65,30 184,30 184,23 179,18 65,18
  text "12in" at 148.5,127 h2 r225
  text "12out" at 155,127 h2 r225
  text "+12V-" at 143,126.5 h2.5 r180
  text "5HV" at 161,126.5 h2 r225
  text "5LV" at 167.5,126.5 h2 r225
  text "+Vout-" at 58,126 h4 r180
  text "5V LV" at 171.5,109 h2
  text "5V HV" at 171.5,104.5 h2
  text "12 out" at 171.5,100.5 h2
  text "12 in" at 171.5,96.5 h2
  text "12 LS" at 171.5,92.5 h2
  text "1" at 177,88 h2
  text "2" at 176.5,84.5 h2
  text "3" at 176.5,81 h2
  text "PWM in" at 181,78 h2 r90
  text "4" at 176.5,77.5 h2
  text "5V" at 177,72.75 h1.8
  text "I50k" at 177,70.25 h1.8
  text "GND" at 177,67.75 h1.8
  text "I500" at 177,65.25 h1.8
  text "Vout" at 177,62.75 h1.8
  text "Vin" at 177,60.25 h1.8
  text "IL Sen" at 148,24 h1.8
  text "Lin" at 75,21 h2 r45
  text "Vin" at 80,21 h2 r45
  text "PWM1" at 108,21 h2 r45
  text "PWM2" at 114,21 h2 r45
  text "PWM3" at 120,21 h2 r45
  text "PWM4" at 126,21 h2 r45
  text "+Vin-" at 36.5,20 h4
  text "Lout" at 93,20 h2 r45
  text "Vout" at 100,20 h2 r45
  text "GNDin" at 68,19 h2 r45
  text "GNDout" at 85,19 h2 r45
  text "GND LV" at 132,19 h1.8 r45
  text "GNDsen" at 138,19 h1.8 r45
  text "80k" at 146,19 h1.8 r45
  text "500" at 151,19 h1.8 r45
  text "Raw" at 156,19 h1.8 r45
  text "Vo Sen" at 162,19 h1.8 r45
  text "Vi Sen" at 168,19 h1.8 r45
Bottom Layer:
  pour cut-out: 36,24 33,27 26,27 23,30 18,30 18,23 23,18 36,18

## Silkscreen, mask and mechanical layers (free items; w line width, h text height)
Top Overlay:
  lines w0.254: 65,98 65,98